# EAGLE board Decoder_Shield (EAGLE 5.06)
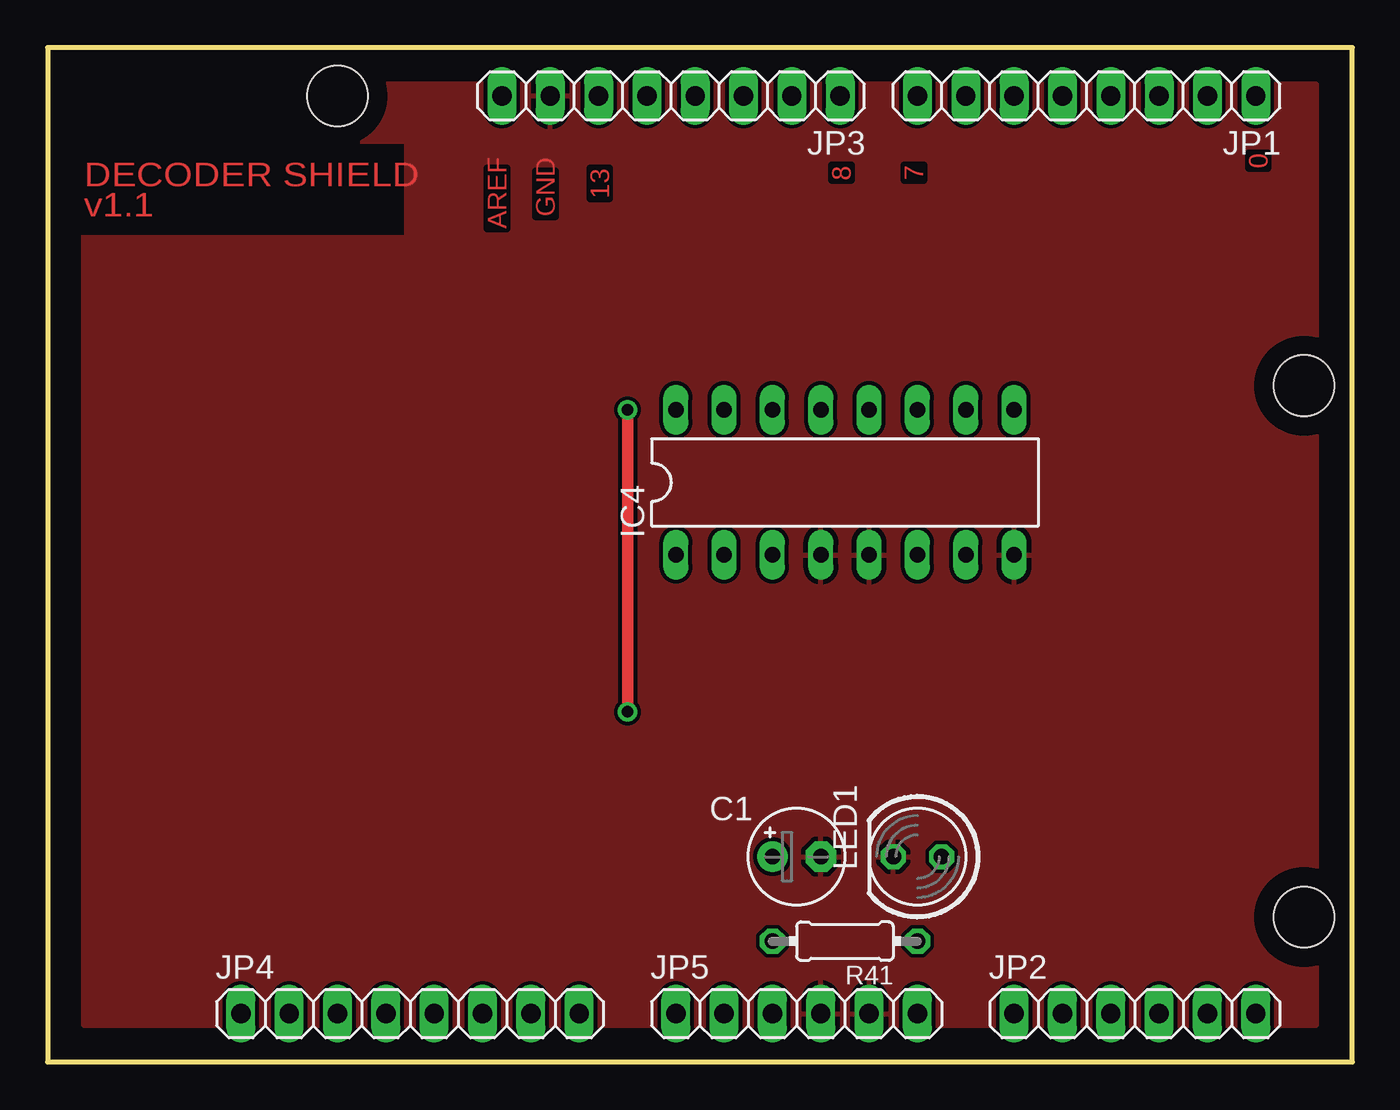
[diagram p0: board, top side]
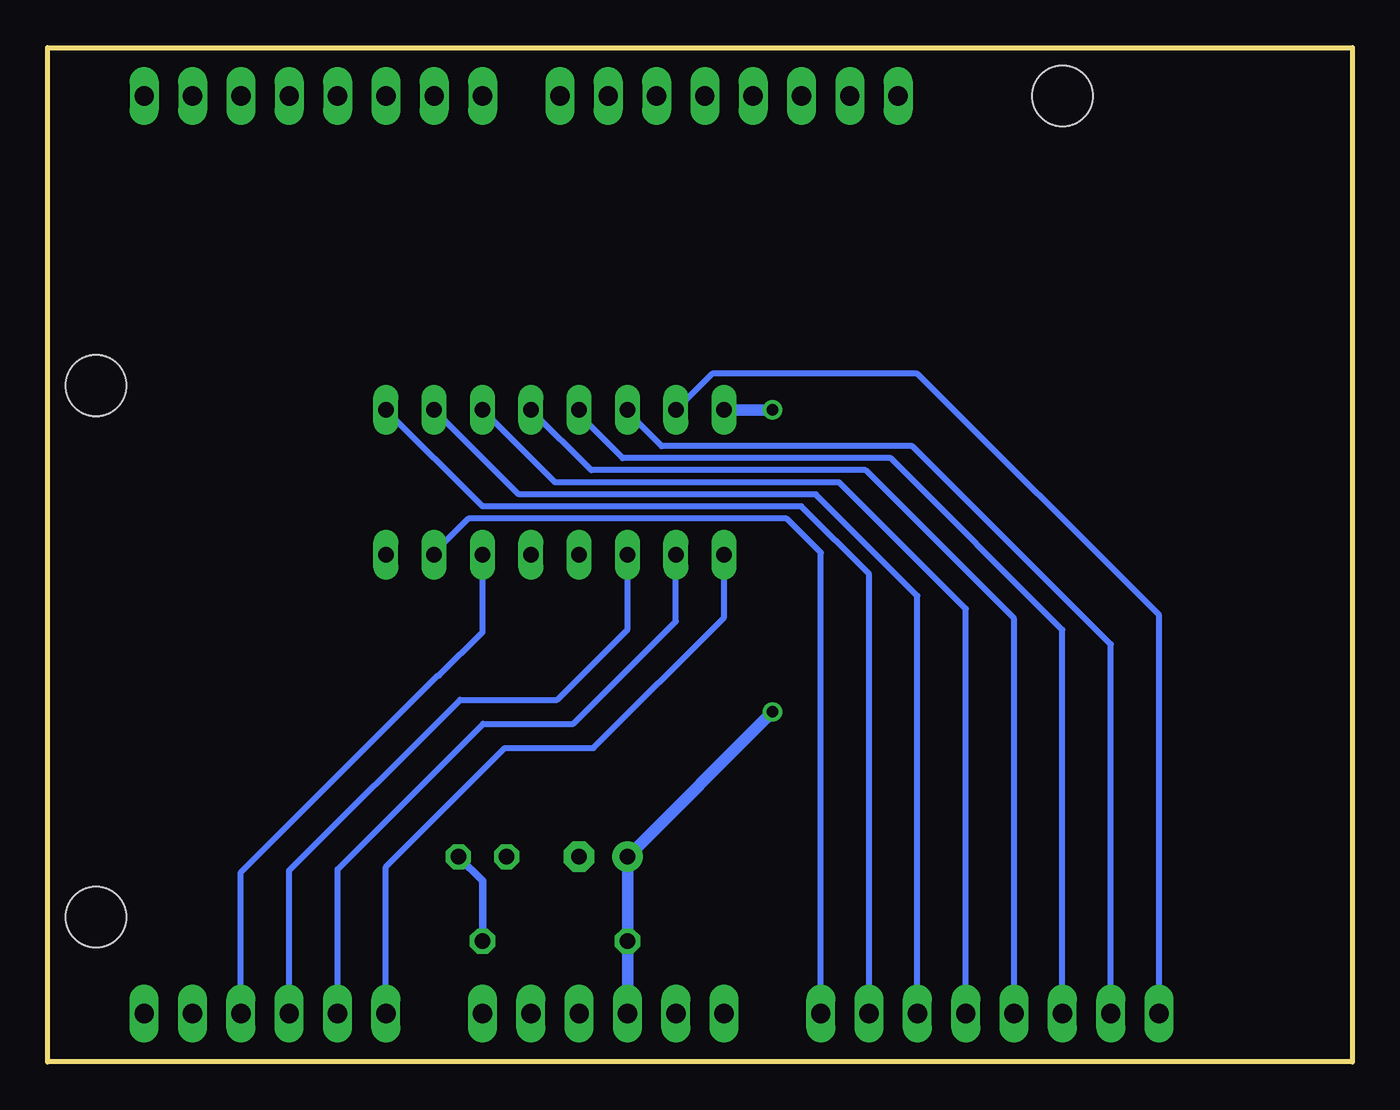
[diagram p1: board, bottom side, seen from below]

Size 68.58 x 53.34 mm. Coordinates in mm from the lower left corner, seen from the top.
Outline: 0,0 68.58,0 68.58,53.34 0,53.34 0,0
Copper layers (1*16): Top 0.035mm / dielectric 1.5mm / Bottom 0.035mm
Design rules "default *": minimum track width 8mil, minimum drill 20mil, track to track 8mil, track to pad 8mil, pad to pad 8mil, via to via 8mil, smd to smd 8mil, copper to edge 40mil, drill to drill 8mil, minimum pad ring 10mil, minimum via ring 8mil, stop-mask expansion 4mil, vias tented up to drill 0mil, thermal gap 10mil
Holes 3.2 mm at 15.24,50.8 66.04,35.56 66.04,7.62
tRestrict: area 0.6,43.5 to 18.7,48.3

## Footprints (pad centres in the part's own frame; a part is rotated, then mirrored left to right if it is on the bottom)
E2,5-5 = drill 0.813 pad 1.6 round: + -1.27,0 | drill 0.813 pad 1.6 octagon: - 1.27,0
DIL16 = drill 0.813 long: 1 -8.89,-3.81; 2 -6.35,-3.81; 3 -3.81,-3.81; 4 -1.27,-3.81; 5 1.27,-3.81; 6 3.81,-3.81; 7 6.35,-3.81; 8 8.89,-3.81; 9 8.89,3.81; 10 6.35,3.81; 11 3.81,3.81; 12 1.27,3.81; 13 -1.27,3.81; 14 -3.81,3.81; 15 -6.35,3.81; 16 -8.89,3.81
1X08 = drill 1.016 long: 1 -8.89,0; 2 -6.35,0; 3 -3.81,0; 4 -1.27,0; 5 1.27,0; 6 3.81,0; 7 6.35,0; 8 8.89,0
1X06 = drill 1.016 long: 1 -6.35,0; 2 -3.81,0; 3 -1.27,0; 4 1.27,0; 5 3.81,0; 6 6.35,0
LED5MM = drill 0.813 octagon: A -1.27,0; K 1.27,0
0204/7 = drill 0.813 octagon: 1 -3.81,0; 2 3.81,0

## Placement (x,y rotation side)
C1  [E2,5-5]  39.37,10.79 0 top
IC4  74LS138N  [DIL16]  41.91,30.48 0 top
JP1  SHIELD_J1  [1X08]  54.61,50.8 180 top
JP2  SHIELD_J2  [1X06]  57.15,2.54 0 top
JP3  SHIELD_J3  [1X08]  32.77,50.8 180 top
JP4  IO_J1  [1X08]  19.05,2.54 0 top
JP5  POWER  [1X06]  39.37,2.54 0 top
LED1  POWER  [LED5MM]  45.72,10.79 180 top
R41  220  [0204/7]  41.91,6.35 180 top

## Library data of the parts
C1 = rcl
IC4 = 74xx-eu
JP1-JP5 = pinhead
LED1 = led
R41 = resistor

## Nets
A0: IC4.1 JP2.1
A1: IC4.2 JP2.2
A2: IC4.3 JP2.3
ADDR_EN: IC4.6 JP2.4
AREF: JP3.8
EN0: IC4.15 JP4.1
EN1: IC4.14 JP4.2
EN2: IC4.13 JP4.3
EN3: IC4.12 JP4.4
EN4: IC4.11 JP4.5
EN5: IC4.10 JP4.6
EN6: IC4.9 JP4.7
EN7: IC4.7 JP4.8
GND: C1.- IC4.4 IC4.5 IC4.8 JP3.7 JP5.4 JP5.5 LED1.K
MISO: JP3.5
MOSI: JP3.4
N$71: LED1.A R41.1
PB0: JP3.1
PB1: JP3.2
PC4: JP2.5
PC5: JP2.6
PD0: JP1.1
PD1: JP1.2
PD2: JP1.3
PD3: JP1.4
PD4: JP1.5
PD5: JP1.6
PD6: JP1.7
PD7: JP1.8
RESET: JP5.1
SCK: JP3.6
SS: JP3.3
VCC: C1.+ IC4.16 JP5.3 R41.2
VCC30: JP5.2
VIN: JP5.6

## Tracks (layer width: path | path; a pad name or v marks a point on that pad's centre or on a via)
A0
  Bottom 0.305: IC4.1 33.02,23.38 39.89,16.51 44.55,16.51 50.8,10.26 JP2.1
A1
  Bottom 0.305: IC4.2 35.56,23.17 40.95,17.78 45.69,17.78 53.34,10.13 JP2.2
A2
  Bottom 0.305: JP2.3 55.88,10.07 46.9,19.05 41.8,19.05 38.1,22.75 IC4.3
ADDR_EN
  Bottom 0.305: JP2.4 58.42,9.98 48.08,20.32 48.01,20.32 45.72,22.61 IC4.6
EN0
  Bottom 0.305: JP4.1 10.16,23.5 22.86,36.2 33.66,36.2 IC4.15
EN1
  Bottom 0.305: JP4.2 12.7,21.96 23.13,32.38 36.3,32.38 38.1,34.18 IC4.14
EN2
  Bottom 0.305: JP4.3 15.24,22.73 24.26,31.75 38.35,31.75 40.64,34.04 IC4.13
EN3
  Bottom 0.305: JP4.4 17.78,23.31 25.59,31.11 40.01,31.11 IC4.12
EN4
  Bottom 0.305: JP4.5 20.32,23.82 26.98,30.48 41.91,30.48 IC4.11
EN5
  Bottom 0.305: JP4.6 22.86,24.51 28.2,29.84 43.81,29.84 IC4.10
EN6
  Bottom 0.305: JP4.7 25.4,25.65 28.96,29.21 45.72,29.21 IC4.9
EN7
  Bottom 0.305: 27.94,3.81 JP4.8 27.94,26.78 29.74,28.57 46.46,28.57 48.26,26.78 IC4.7
GND
  pour Top: 1.91,51.44 66.67,51.44 66.67,47.62 66.67,15.24 66.67,1.91 1.91,1.91 1.91,6.99 1.91,35.56
N$71
  Bottom 0.406: R41.1 45.72,9.53 LED1.A
VCC  (via drill 0.6)
  Top 0.61: v30.48,18.41 v30.48,34.29
  Bottom 0.61: v30.48,34.29 IC4.16 | v30.48,18.41 C1.+ R41.2 JP5.3

## Text on the board
Top: 0 | DECODER SHIELD | 8 | 7 | 13 | v1.1 | AREF | GND